# Altium PCB NumPadPCB.PcbDoc
Units mm, origin at the board's own origin, x right, y up, seen from the top; angles counter-clockwise.
Board outline 116.75 x 99.05 mm, 2 copper layers (Top Layer, Bottom Layer); 96 components, 85 nets, 416 pads, 90 vias.
Unrouted connection lines stored in the file: 5.
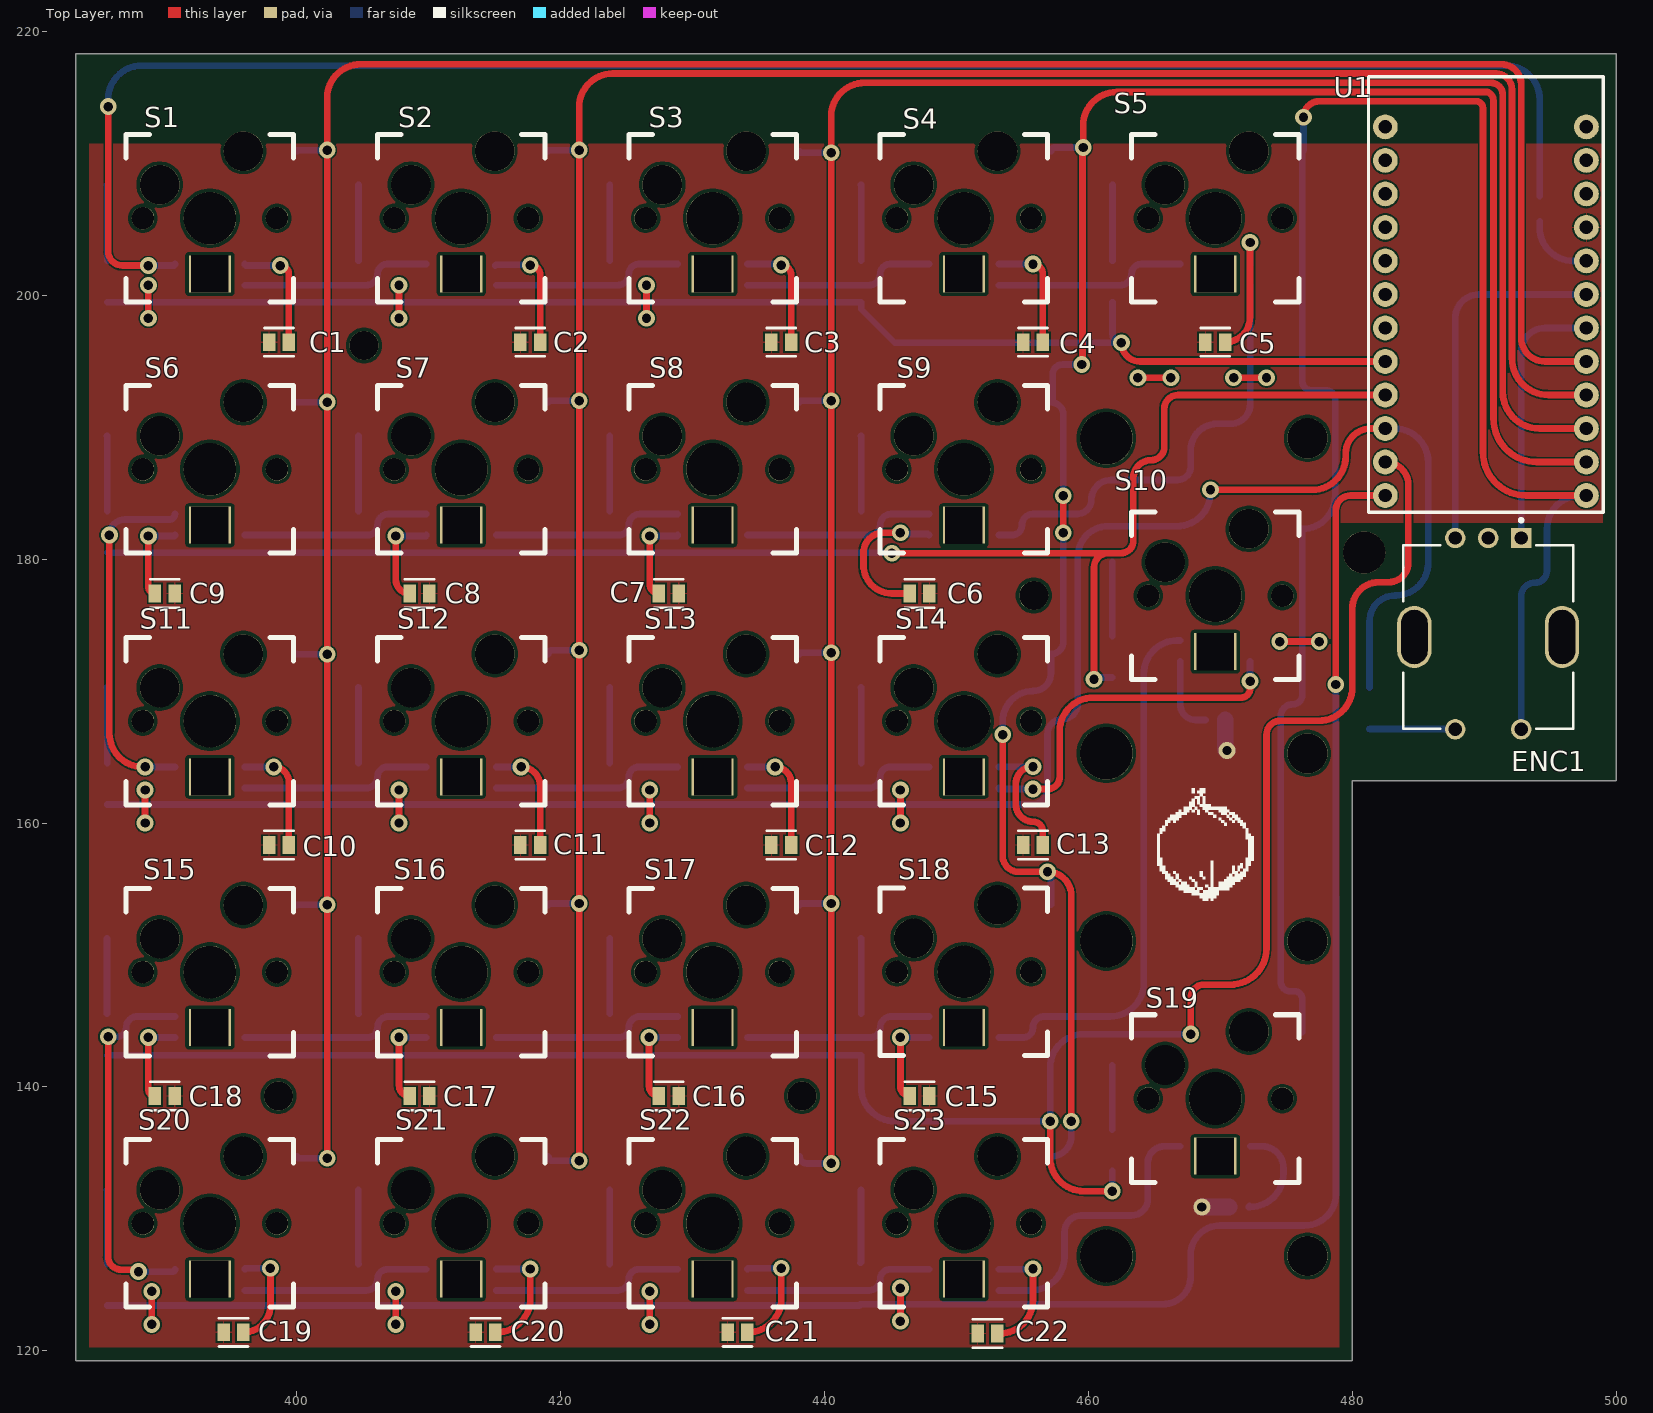
[diagram p0: Top Layer view]
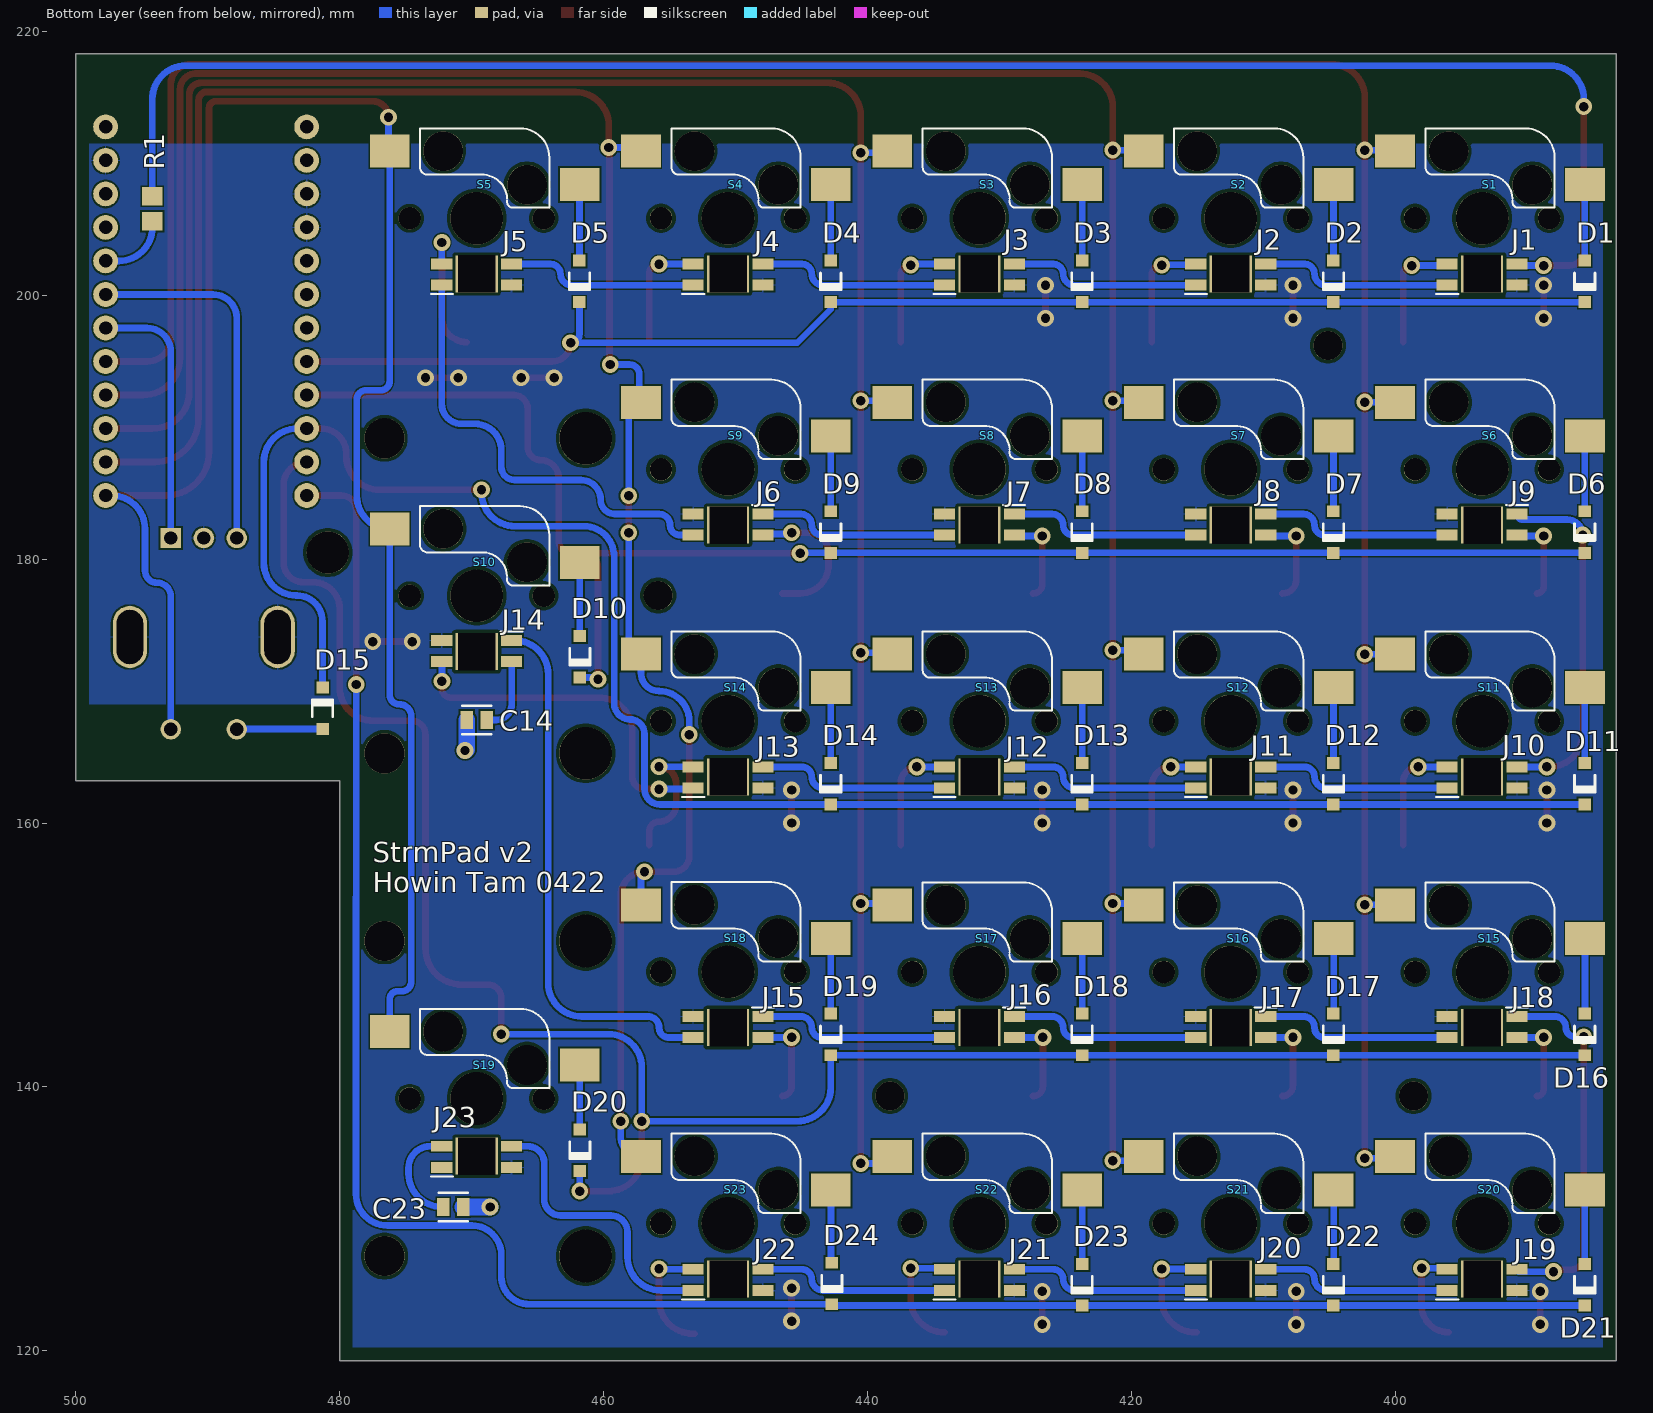
[diagram p1: Bottom Layer view, seen from below]

## Layer stack, top to bottom
Top Solder: solder mask 0.0102, Solder Resist, Dk 3.5
Top Layer: signal copper 0.0356
Dielectric 1: dielectric 0.32, FR-4, Dk 4.8
Bottom Layer: signal copper 0.0356
Bottom Solder: solder mask 0.0102, Solder Resist, Dk 3.5

## Board outline
383.25,119.25 383.25,218.3 500,218.3 500,163.2 480,163.2 480,119.25

## Design rules (kind name [scope] priority, off if disabled: settings)
BoardOutlineClearance [All] p1: gap=0.2 ignorepadtopadclearanceinfootprint=FALSE
Clearance [All] p1: gap=0.127 ignorepadtopadclearanceinfootprint=FALSE except(0.25: Arc-Hole Track-Hole SMDPad-Hole THPad-Hole Via-Hole Fill-Hole Poly-Hole Region-Hole Text-Hole)
ComponentClearance [All] p1: gap=0.127 collisioncheckmode=3 verticalgap=0.127 showdistances=TRUE
DiffPairsRouting [All] p1: maxlimit=0.254 minlimit=0.127 mostfreqgap=0.127 toplayer_minwidth=0.127 toplayer_maxwidth=25.4 toplayer_prefwidth=0.127 bottomlayer_minwidth=0.127 bottomlayer_maxwidth=25.4 bottomlayer_prefwidth=0.127 maxuncoupledlength=12.7
Height [All] p1: minheight=0 maxheight=1816.048 prefheight=12.7
HoleSize [All] p1: absolutevalues=TRUE maxlimit=6.3 minlimit=0.3 maxpercent=80.000 minpercent=20.000
HoleToHoleClearance [All] p1: gap=0.25 allowstackedmicrovias=FALSE
MinimumAnnularRing [All] p1: minimumring=0.076
MinimumSolderMaskSliver [All] p1: minsoldermaskwidth=0
PlaneClearance [All] p1: clearance=0.127
PlaneConnect PlaneConnectPowerPads [InPadClass('PowerPads')] p1: planeconnectstyle=Direct reliefexpansion=0.508 reliefentries=4 reliefconductorwidth=0.254 reliefairgap=0.254
PlaneConnect [All] p2: pad.planeconnectstyle=Relief pad.reliefexpansion=0.3 pad.reliefentries=4 pad.reliefconductorwidth=0.127 pad.reliefairgap=0.127 via.planeconnectstyle=Direct via.reliefexpansion=0.3 via.reliefentries=4 via.reliefconductorwidth=0.127 via.reliefairgap=0.127
PolygonConnect PolygonConnectPowerPads [All vs (InPadClass('PowerPads'))] p1: connectstyle=Direct reliefconductorwidth=0.254 reliefentries=4 polygonreliefangle="90 Angle" airgapwidth=0.254
PolygonConnect [All] p2: thpad.connectstyle=Relief thpad.reliefconductorwidth=0.127 thpad.reliefentries=4 thpad.polygonreliefangle="90 Angle" thpad.airgapwidth=0.127 smdpad.connectstyle=Relief smdpad.reliefconductorwidth=0.127 smdpad.reliefentries=4 smdpad.polygonreliefangle="90 Angle" smdpad.airgapwidth=0.127 via.connectstyle=Direct via.reliefconductorwidth=0.127 via.reliefentries=4 via.polygonreliefangle="90 Angle" via.airgapwidth=0.127
RoutingVias [All] p1: holewidth=0.3 width=0.6 viastyle="Through Hole" minholewidth=0.3 minwidth=0.6 maxholewidth=0.6 maxwidth=6.6
SilkToSilkClearance [All] p1: silktosilkclearance=0
SilkToSolderMaskClearance [IsPad] p1: minsilkscreentomaskgap=0.127 clearancetoexposedcopper=TRUE
SolderMaskExpansion [All] p1: expansion=0.075 istentingtop=FALSE
Width [All] p1: maxlimit=25.4 minlimit=0.127 preferedwidth=0.127 minimp=50.000000 maximp=50.000000 favimp=50.000000
20 further rules are at their usual default settings.

## Classes and differential pairs
component class InSwitchLEDs: C1 C2 C3 C4 C5 C6 C7 C8 C9 C10 C11 C12 C13 C14 C15 C16 C17 C18 C19 C20 C21 C22 C23 J1 J2 J3 J4 J5 J6 J7 J8 J9 J10 J11 J12 J13 J14 J15 J16 J17 J18 J19 J20 J21 J22 J23
component class Main_Design: * D1 D2 D3 D4 D5 D6 D7 D8 D9 D10 D11 D12 D13 D14 D15 D16 D17 D18 D19 D20 D21 D22 D23 D24 ENC1 R1 S1 S2 S3 S4 S5 S6 S7 S8 S9 S10 S11 S12 S13 S14 S15 S16 S17 S18 S19 S20 S21 S22 S23 U1

## Components (designator, comment, footprint, x,y, rotation, side; value= is the part's Value field where it differs from the comment)
C1 "C0805C104K5RACTU" FP-C0805C-DN-MFG 398.65,196.444 r180 top value="0.10 μF"
C2 "C0805C104K5RACTU" FP-C0805C-DN-MFG 417.7,196.444 r180 top value="0.10 μF"
C3 "C0805C104K5RACTU" FP-C0805C-DN-MFG 436.722,196.444 r180 top value="0.10 μF"
C4 "C0805C104K5RACTU" FP-C0805C-DN-MFG 455.794,196.444 r180 top value="0.10 μF"
C5 "C0805C104K5RACTU" FP-C0805C-DN-MFG 469.615,196.444 r180 top value="0.10 μF"
C6 "C0805C104K5RACTU" FP-C0805C-DN-MFG 447.2,177.402 r0 top value="0.10 μF"
C7 "C0805C104K5RACTU" FP-C0805C-DN-MFG 428.2,177.402 r0 top value="0.10 μF"
C8 "C0805C104K5RACTU" FP-C0805C-DN-MFG 409.3,177.402 r0 top value="0.10 μF"
C9 "C0805C104K5RACTU" FP-C0805C-DN-MFG 390,177.402 r0 top value="0.10 μF"
C10 "C0805C104K5RACTU" FP-C0805C-DN-MFG 398.65,158.327 r180 top value="0.10 μF"
C11 "C0805C104K5RACTU" FP-C0805C-DN-MFG 417.7,158.327 r180 top value="0.10 μF"
C12 "C0805C104K5RACTU" FP-C0805C-DN-MFG 436.722,158.327 r180 top value="0.10 μF"
C13 "C0805C104K5RACTU" FP-C0805C-DN-MFG 455.794,158.327 r180 top value="0.10 μF"
C14 "C0805C104K5RACTU" FP-C0805C-DN-MFG 469.615,167.814 r0 bottom value="0.10 μF"
C15 "C0805C104K5RACTU" FP-C0805C-DN-MFG 447.2,139.317 r0 top value="0.10 μF"
C16 "C0805C104K5RACTU" FP-C0805C-DN-MFG 428.2,139.302 r0 top value="0.10 μF"
C17 "C0805C104K5RACTU" FP-C0805C-DN-MFG 409.3,139.302 r0 top value="0.10 μF"
C18 "C0805C104K5RACTU" FP-C0805C-DN-MFG 390,139.302 r0 top value="0.10 μF"
C19 "C0805C104K5RACTU" FP-C0805C-DN-MFG 395.2,121.4 r180 top value="0.10 μF"
C20 "C0805C104K5RACTU" FP-C0805C-DN-MFG 414.3,121.4 r180 top value="0.10 μF"
C21 "C0805C104K5RACTU" FP-C0805C-DN-MFG 433.4,121.4 r180 top value="0.10 μF"
C22 "C0805C104K5RACTU" FP-C0805C-DN-MFG 452.35,121.3 r180 top value="0.10 μF"
C23 "C0805C104K5RACTU" FP-C0805C-DN-MFG 471.4,130.9 r180 bottom value="0.10 μF"
D1 "1N4148W-7-F" DIOD-SOD123-2_V 385.63,201.05 r270 bottom
D2 "1N4148W-7-F" DIOD-SOD123-2_V 404.68,201.05 r270 bottom
D3 "1N4148W-7-F" DIOD-SOD123-2_V 423.73,201.05 r270 bottom
D4 "1N4148W-7-F" DIOD-SOD123-2_V 442.78,201.05 r270 bottom
D5 "1N4148W-7-F" DIOD-SOD123-2_V 461.83,201.05 r270 bottom
D6 "1N4148W-7-F" DIOD-SOD123-2_V 385.63,182.05 r270 bottom
D7 "1N4148W-7-F" DIOD-SOD123-2_V 404.68,182.05 r270 bottom
D8 "1N4148W-7-F" DIOD-SOD123-2_V 423.73,182.05 r270 bottom
D9 "1N4148W-7-F" DIOD-SOD123-2_V 442.78,182.05 r270 bottom
D10 "1N4148W-7-F" DIOD-SOD123-2_V 461.8,172.6 r270 bottom
D11 "1N4148W-7-F" DIOD-SOD123-2_V 385.63,162.975 r270 bottom
D12 "1N4148W-7-F" DIOD-SOD123-2_V 404.68,162.975 r270 bottom
D13 "1N4148W-7-F" DIOD-SOD123-2_V 423.73,162.975 r270 bottom
D14 "1N4148W-7-F" DIOD-SOD123-2_V 442.78,162.975 r270 bottom
D15 "1N4148W-7-F" DIOD-SOD123-2_V 481.3,168.7 r90 bottom
D16 "1N4148W-7-F" DIOD-SOD123-2_V 385.63,143.975 r270 bottom
D17 "1N4148W-7-F" DIOD-SOD123-2_V 404.68,143.975 r270 bottom
D18 "1N4148W-7-F" DIOD-SOD123-2_V 423.73,143.975 r270 bottom
D19 "1N4148W-7-F" DIOD-SOD123-2_V 442.78,143.975 r270 bottom
D20 "1N4148W-7-F" DIOD-SOD123-2_V 461.8,135.2 r270 bottom
D21 "1N4148W-7-F" DIOD-SOD123-2_V 385.63,125 r270 bottom
D22 "1N4148W-7-F" DIOD-SOD123-2_V 404.68,125 r270 bottom
D23 "1N4148W-7-F" DIOD-SOD123-2_V 423.73,125 r270 bottom
D24 "1N4148W-7-F" DIOD-SOD123-2_V 442.7,125.1 r270 bottom
ENC1 "PEC12R-4225F-S0024" FP-PEC12R-4225F-S0024-MFG 490.3,174.1 r180 top
J1 "4960" 4960_Adafruit 397.315,201.216 r180 bottom
J2 "4960" 4960_Adafruit 416.365,201.216 r180 bottom
J3 "4960" 4960_Adafruit 435.415,201.216 r180 bottom
J4 "4960" 4960_Adafruit 454.465,201.216 r180 bottom
J5 "4960" 4960_Adafruit 473.515,201.216 r180 bottom
J6 "4960" 4960_Adafruit 446.665,182.973 r0 bottom
J7 "4960" 4960_Adafruit 427.615,182.973 r0 bottom
J8 "4960" 4960_Adafruit 408.565,182.973 r0 bottom
J9 "4960" 4960_Adafruit 389.515,182.973 r0 bottom
J10 "4960" 4960_Adafruit 397.315,163.098 r180 bottom
J11 "4960" 4960_Adafruit 416.365,163.098 r180 bottom
J12 "4960" 4960_Adafruit 435.415,163.098 r180 bottom
J13 "4960" 4960_Adafruit 454.465,163.098 r180 bottom
J14 "4960" 4960_Adafruit 465.715,173.389 r0 bottom
J15 "4960" 4960_Adafruit 446.665,144.89 r0 bottom
J16 "4960" 4960_Adafruit 427.615,144.89 r0 bottom
J17 "4960" 4960_Adafruit 408.565,144.89 r0 bottom
J18 "4960" 4960_Adafruit 389.515,144.89 r0 bottom
J19 "4960" 4960_Adafruit 397.315,125.025 r180 bottom
J20 "4960" 4960_Adafruit 416.365,125.025 r180 bottom
J21 "4960" 4960_Adafruit 435.415,125.025 r180 bottom
J22 "4960" 4960_Adafruit 454.465,125.025 r180 bottom
J23 "4960" 4960_Adafruit 473.515,134.348 r180 bottom
R1 "ERA6AEB511V" RESC2013X60X40ML20T25 494.2,206.55 r90 bottom
S1 "PG151101S11" SW_PG151101S11 375,200 r0 top
S2 "PG151101S11" SW_PG151101S11 394.05,200 r0 top
S3 "PG151101S11" SW_PG151101S11 413.1,200 r0 top
S4 "PG151101S11" SW_PG151101S11 432.15,200 r0 top
S5 "PG151101S11" SW_PG151101S11 451.193,200 r0 top
S6 "PG151101S11" SW_PG151101S11 375,180.958 r0 top
S7 "PG151101S11" SW_PG151101S11 394.05,180.958 r0 top
S8 "PG151101S11" SW_PG151101S11 413.1,180.958 r0 top
S9 "PG151101S11" SW_PG151101S11 432.15,180.958 r0 top
S10 "PG151101S11" SW_PG151101S11 451.2,171.375 r0 top
S11 "PG151101S11" SW_PG151101S11 375,161.883 r0 top
S12 "PG151101S11" SW_PG151101S11 394.05,161.883 r0 top
S13 "PG151101S11" SW_PG151101S11 413.1,161.883 r0 top
S14 "PG151101S11" SW_PG151101S11 432.15,161.883 r0 top
S15 "PG151101S11" SW_PG151101S11 375,142.858 r0 top
S16 "PG151101S11" SW_PG151101S11 394.05,142.858 r0 top
S17 "PG151101S11" SW_PG151101S11 413.1,142.858 r0 top
S18 "PG151101S11" SW_PG151101S11 432.15,142.873 r0 top
S19 "PG151101S11" SW_PG151101S11 451.2,133.275 r0 top
S20 "PG151101S11" SW_PG151101S11 375,123.808 r0 top
S21 "PG151101S11" SW_PG151101S11 394.05,123.808 r0 top
S22 "PG151101S11" SW_PG151101S11 413.1,123.808 r0 top
S23 "PG151101S11" SW_PG151101S11 432.15,123.808 r0 top
U1 "ProMicro" PCBComponent_1 469.8,193.71 r0 top

## Footprints (in the part's own frame and the unit in brackets; to place one, negate y for a bottom-side part, rotate by r counter-clockwise, add the part's x,y. Pads: shape width x height; smd on the part's side, far side on the other; paste and mask are expansions set on the pad)
4960_Adafruit [mm]
  rect 1.6x0.82 smd mask+0.051: 1(1.25,1.15) 2(1.25,-0.45) 3(6.55,-0.45) 4(6.55,1.15)
  rect 3.2x2.8 hole 2.8 square paste-3.988 mask+0.051: Un1(3.9,0.4)
  silkscreen extent 0.43,-1.12 2.1,-1.12
DIOD-SOD123-2_V [mm] "SOD123, 2-Leads, Body 2.7x1.55mm, Height 1.45mm"
  rect 0.9x0.95 smd: 1(-1.575,0) 2(1.575,0)
  silkscreen extent -0.64,-0.83 0.64,0.77, body extent -1.35,-0.77 1.35,0.77, height 1.45
FP-C0805C-DN-MFG [mm]
  rect 0.95x1.35 smd paste+0 mask+0: 1(-0.75,0) 2(0.75,0)
  silkscreen extent -1.1,-1.07 1.1,1.07, body extent -1.4,-0.85 1.4,0.85, height 0.25
FP-PEC12R-4225F-S0024-MFG [mm]
  round 1.55 hole 1 paste-1000 mask+0: 1(-2.5,7) 2(2.5,7) B(2.5,-7.5) C(0,-7.5)
  rrect100% 2.6x4.7 hole 4.1 slot 2 at 0 deg paste-1000 mask+0: 3(-5.6,0) 4(5.6,0)
  rect 1.55x1.55 hole 1 paste-1000 mask+0: A(-2.5,-7.5)
  silkscreen extent -6.45,-8.97 6.45,6.95, body extent -7,-8.37 7,7.88, height 0.25
PCBComponent_1 [mil]
  round 74 hole 40: 1(500,750) 2(500,650) 3(500,550) 4(500,450) 5(500,350) 6(500,250) 7(500,150) 8(500,50) 9(500,-50) 10(500,-150) 11(500,-250) 12(500,-350) 13(1100,-350) 14(1100,-250) 15(1100,-150) 16(1100,-50) 17(1100,50) 18(1100,150) 19(1100,250) 20(1100,350) 21(1100,450) 22(1100,550) 23(1100,650) 24(1100,750)
  silkscreen extent 450,-400 1150,900
RESC2013X60X40ML20T25 [mm] "Chip Resistor, 2-Leads, Body 2.00x1.25mm, IPC Low Density"
  rect 1.4x1.55 smd: 1(-0.95,0) 2(0.95,0)
  body extent -1.1,-0.72 1.1,0.72, height 0.6
SW_PG151101S11 [mil]
  rect 118.11x98.43 smd far side mask+2.01: 1(984.84,430) 2(417.91,330)
  round 157 hole 157 paste-157 mask+2.01: Un1(725,230)
  round 67 hole 67 paste-67 mask+2.01: Un2(525,230) Un3(925,230)
  round 118.11 hole 118.11 paste-118.11 mask+2.01: Un4(825,430) Un5(575,330)
  silkscreen extent 475,-20 975,480

## Part data
C1 C2 C3 C4 C5 C6 C7 C8 C9 C10 C11 C12 C13 C14 C15 C16 C17 C18 C19 C20 C21 C22 C23: library part CMP-2007-00279-2, "CAP CER 0.1UF 50V X7R 0805", Capacitance="0.10 μF", Manufacturer=KEMET, Package=C0805C-DN, Temperature="-55°C to +125°C", Temperature Characteristic=X7R, Temperature Coefficient=30ppm/°C, Temperature Range High=+125°C, Temperature Range Low=-55°C, Tolerance=0.1, Voltage Rating="50 V", Automotive=No, Category=Cap, ComponentLink2Description=Datasheet, ComponentLink2URL=https://content.kemet.com/datasheets/KEM_C1003_C0G_SMD.pdf, Device Class L1="Passive Components", Device Class L2=Capacitors, Device Class L3="Ceramic Capacitors", Digikey Description="CAP CER 0.1UF 50V X7R 0805", Height=0.88mm, Ipc Land Pattern Name=CAPC200125X78, Lead Free=Yes, Manufacturer Part Number=C0805C104K5RACTU, Material=Ceramic, Mouser Description="Cap Ceramic 0.1uF 50V X7R 10% SMD 2.0 x 1.2 mm 125 C Paper T/R", Octopart=https://octopart.com/c0805c104k5ractu-kemet-143926, RoHS=TRUE
D1 D2 D3 D4 D5 D6 D7 D8 D9 D10 D11 D12 D13 D14 D15 D16 D17 D18 D19 D20 D21 D22 D23 D24: library part CMP-2000-04932-2, "Fast Switching Diode, 100 V, 0.15 A, -65 to 150 degC, 2-Pin?SOD123, RoHS, Tape and Reel", If - Forward Current=0.15A, Ir - Reverse Current=1uA, Manufacturer=DiodesIncorporated, Max Surge Current=2A, Maximum Operating Temperature=+150C, Minimum Operating Temperature=-65C, Operating Temperature Range=-65Cto+150C, Package / Case=SOD-123, Package Reference=SOD123-2, Peak Reverse Voltage=100V, Vf - Forward Voltage=1.25V, Brand=DiodesIncorporated, Configuration=Single, Datasheet URL=http://www.farnell.com/datasheets/1915529.pdf, Datasheet Version="Rev. 24-2, 10/2013", Factory Pack Quantity=3000, Height=1.25mm, Length=2.85mm, Manufacturer URL=http://www.diodes.com/, Mounting Style=SMD/SMT, Package URL=http://www.diodes.com/datasheets/ds18004.pdf, Packaging=Reel, Product=SwitchingDiodes, Product Category=Diodes-GeneralPurpose,Power,Switching, Recovery Time=4ns, RoHS=True, Series=1N4148, Type=SwitchingDiode, Unit Weight=0.000353oz, Width=1.7mm
ENC1: library part CMP-07421-000041-1, "ROTARY ENCODER MECHANICAL 24PPR", Max Operating Temperature=70°C, Min Operating Temperature=-30°C, Package Quantity=75, Built in Switch=Yes, Detent=Yes, Encoder Type=Mechanical, Height=13.4mm, Hole Diameter=1mm, Length=13.4mm, Mount="Through Hole", Number of Channels=2, Orientation=Vertical, Output Type=Quadrature, Packaging=Bulk, Pulses per Revolution=24, REACH SVHC="No SVHC", RoHS Compliant=Yes, Series=PEC12R, Termination="PC Pin", Width=12.5mm
J1 J2 J3 J4 J5 J6 J7 J8 J9 J10 J11 J12 J13 J14 J15 J16 J17 J18 J19 J20 J21 J22 J23 U1: library part Component_1
R1: library part CMP-2001-00648-1, Manufacturer=Panasonic, Part Number=ERA6AEB511V
S1 S2 S3 S4 S5 S6 S7 S8 S9 S10 S11 S12 S13 S14 S15 S16 S17 S18 S19 S20 S21 S22 S23: "Keyswitch", Package=Package, Availability=Unavailable, MF=Kailh, MP=PG151101S11, Price=None, SnapEDA_Link=https://www.snapeda.com/parts/PG151101S11/Kailh/view-part/4218555/?ref=snap

## Free pads (board coordinates)
  round 2.2 hole 2.2: 1(405.1,196.198) 3(398.608,139.302) 3(455.858,177.25) 4(438.288,139.302)
  round 3.2 hole 3.2: 2(480.9,180.5)
  round 3.988 hole 3.988: ST1(461.36,127.179) ST1(461.36,151.055) ST1(461.36,165.279) ST1(461.36,189.155)
  round 3.048 hole 3.048: ST4(476.6,127.179) ST4(476.6,151.055) ST4(476.6,165.279) ST4(476.6,189.155)

## Via types
v1: diameter 1.27, hole 0.711, Top Layer to Bottom Layer, 90 vias

## Nets (pads, with @x,y where several pads share a name; then routed paths per layer and width w, separated by ;. In a path a pad name is that pad's centre, name@x,y a point inside that pad or via, vN(x,y) a via of type N, cw(c..) or ccw(c..) an arc to the next point about the centre after c; other vN are vias at no path point)
Col0: S1.1 S6.1 S11.1 S15.1 S20.1 U1.17 | length 209.9
  Top Layer w0.508: v1(402.3,134.6) v1(402.3,153.8) v1(402.3,172.8) v1(402.3,191.9) v1(402.3,211) 402.3,214.96 cw(c404.84,214.96) 404.84,217.5 491.3,217.5 cw(c491.3,216) 492.8,216 492.8,196.784 ccw(c494.604,196.784) 494.604,194.98 U1.17
  Bottom Layer w0.508: S20.1 ccw(c400.145,134.73) 400.145,134.6 v1(402.3,134.6) ; S15.1 cw(c400.035,153.78) 400.035,153.8 v1(402.3,153.8) ; S11.1 400.015,172.8 v1(402.3,172.8) ; S6.1 cw(c400.035,191.88) 400.035,191.9 v1(402.3,191.9) ; S1.1 cw(c400.093,210.922) 400.093,211 v1(402.3,211)
Col1: S2.1 S7.1 S12.1 S16.1 S21.1 U1.16 | length 192.5
  Top Layer w0.508: v1(421.4,134.4) v1(421.4,153.9) v1(421.4,173.1) v1(421.4,192) v1(421.4,211) 421.4,214.26 cw(c423.94,214.26) 423.94,216.8 490.9,216.8 cw(c490.9,215.6) 492.1,215.6 492.1,195.22 ccw(c494.88,195.22) 494.88,192.44 U1.16
  Bottom Layer w0.508: S21.1 ccw(c419.395,134.73) 419.395,134.4 v1(421.4,134.4) ; S16.1 cw(c419.185,153.78) 419.185,153.9 v1(421.4,153.9) ; S12.1 cw(c419.36,172.805) 419.36,173.1 v1(421.4,173.1) ; S7.1 cw(c419.185,191.88) 419.185,192 v1(421.4,192) ; S2.1 cw(c419.143,210.922) 419.143,211 v1(421.4,211)
Col2: S3.1 S8.1 S13.1 S17.1 S22.1 U1.15 | length 175.2
  Top Layer w0.508: v1(440.5,134.2) v1(440.5,153.9) v1(440.5,172.9) v1(440.5,192) v1(440.5,210.8) 440.5,213.56 cw(c443.04,213.56) 443.04,216.1 490.5,216.1 cw(c490.5,215.2) 491.4,215.2 491.4,192.68 ccw(c494.18,192.68) 494.18,189.9 U1.15
  Bottom Layer w0.508: S22.1 ccw(c438.645,134.73) 438.645,134.2 v1(440.5,134.2) ; S17.1 cw(c438.235,153.78) 438.235,153.9 v1(440.5,153.9) ; S13.1 cw(c438.21,172.805) 438.21,172.9 v1(440.5,172.9) ; S8.1 cw(c438.235,191.88) 438.235,192 v1(440.5,192) ; S3.1 ccw(c438.237,210.922) 438.237,210.8 v1(440.5,210.8)
Col3: S4.1 S9.1 S14.1 S18.1 S23.1 U1.14 | length 159.3
  Top Layer w0.508: v1(453.5,166.7) 453.5,157.5 ccw(c454.7,157.5) 454.7,156.3 v1(456.9,156.3) cw(c456.9,154.5) 458.7,154.5 v1(458.7,137.4) ; v1(458.1,182) v1(458.1,184.8) ; v1(459.5,194.75) 459.55,194.8 459.55,211.15 v1(459.6,211.2) 459.6,212.86 cw(c462.14,212.86) 462.14,215.4 488.391,215.4 490.233,215.4 cw(c490.033,214.764) 490.7,214.764 490.7,190.64 ccw(c493.98,190.64) 493.98,187.36 U1.14
  Bottom Layer w0.508: v1(453.5,166.7) 453.5,167.7 cw(c455.8,167.7) 455.8,170 ccw(c455.8,171.365) 457.165,171.365 S14.1 ccw(c457.165,173.74) 458.1,173.74 v1(458.1,182) ; v1(456.9,156.3) cw(c456.9,156.035) 457.165,156.035 S18.1 ; S23.1 ccw(c457.165,136.265) 458.7,136.265 v1(458.7,137.4) ; S4.1 cw(c457.443,210.922) 457.443,211.2 v1(459.6,211.2) ; v1(458.1,184.8) 458.1,190.945 ccw(c457.165,190.945) 457.683,191.723 ccw(c457.165,190.945) S9.1 ccw(c457.165,192.011) 457.296,192.011 457.296,194.016 cw(c458.03,194.016) 458.03,194.75 v1(459.5,194.75)
Col4: ENC1.1 S5.1 S10.1 S19.1 U1.13 | length 145.8
  Top Layer w0.508: v1(476.3,213.5) cw(c477.5,213.5) 477.5,214.7 489.4,214.7 cw(c489.4,214.2) 489.711,214.592 489.792,214.511 cw(c489.4,214.2) 489.9,214.2 489.9,188.1 ccw(c493.18,188.1) 493.18,184.82 U1.13
  Bottom Layer w0.508: S19.1@476.208,144.165 476.208,146.646 ccw(c475.604,146.646) 475.604,147.25 475.298,147.25 cw(c475.298,147.976) 474.572,147.976 474.572,168.072 cw(c475.5,168.072) 475.5,169 ccw(c475.5,169.708) 476.208,169.708 476.208,182.292 ccw(c476.208,184.784) 478.7,184.784 478.7,192.1 ccw(c478,192.1) 478,192.8 476.9,192.8 cw(c476.9,193.485) 476.215,193.485 476.215,210.922 ccw(c476.215,211.007) 476.3,211.007 v1(476.3,213.5) ; ENC1.1 492.8,177.16 cw(c493.854,177.16) 493.854,178.214 ccw(c493.854,179.11) 494.75,179.11 494.75,182.28 cw(c497.29,182.28) 497.29,184.82 U1.13
En_A: ENC1.A U1.18 | length 20.1
  Bottom Layer w0.508: ENC1.A 492.8,195.72 cw(c494.6,195.72) 494.6,197.52 U1.18
En_B: ENC1.B U1.19 | length 27.6
  Bottom Layer w0.508: ENC1.B 487.8,198.26 cw(c489.6,198.26) 489.6,200.06 U1.19
Encode_Out: D15.1 ENC1.2 | length 6.5
  Bottom Layer w0.508: D15.1 487.775,167.125 cw(c487.775,167.1) ENC1.2
GND: ENC1.3 ENC1.4 ENC1.C J1.3 J2.3 J3.3 J4.3 J5.3 J6.3 J7.3 J8.3 J9.3 J10.3 J11.3 J12.3 J13.3 J14.3 J15.3 J16.3 J17.3 J18.3 J19.3 J20.3 J21.3 J22.3 J23.3 U1.3 U1.4 U1.23 | length 35.5
  Top Layer w0.508: v1(388.5,160) v1(388.5,162.5) ; v1(388.75,198.25) v1(388.75,200.75) ; v1(389,122) v1(389,124.5) ; v1(407.5,122) v1(407.5,124.5) ; v1(407.75,160) v1(407.75,162.5) ; v1(407.75,198.25) v1(407.75,200.75) ; v1(426.5,198.25) v1(426.5,200.75) ; v1(426.75,122) v1(426.75,124.5) ; v1(426.75,160) v1(426.75,162.5) ; v1(445.75,122.25) v1(445.75,124.75) ; v1(445.75,160) v1(445.75,162.5) ; v1(463.75,193.75) v1(466.25,193.75) ; v1(471,193.75) v1(473.5,193.75) ; v1(474.5,173.75) v1(477.5,173.75)
LED1: J7.2 J8.4 | length 14.7
  Bottom Layer w0.508: J8.4 424.415,181.823 ccw(c424.415,182.573) 425.165,182.573 cw(c426.015,182.573) 426.015,183.423 J7.2
LED2: J14.2 J15.4 | length 41
  Bottom Layer w0.508: J15.4 455.044,143.74 ccw(c455.044,144.49) 455.794,144.49 cw(c456.644,144.49) 456.644,145.34 461.66,145.34 ccw(c461.66,147.88) 464.2,147.88 464.2,171.299 cw(c466.74,171.299) 466.74,173.839 J14.2
LED3: J21.2 J22.4 | length 14.7
  Bottom Layer w0.508: J21.2 443.365,124.575 ccw(c443.365,125.425) 444.215,125.425 cw(c444.965,125.425) 444.965,126.175 J22.4
LEDs: J1.4 R1.2 | length 136
  Top Layer w0.508: v1(385.7,214.3) 385.7,203.34 ccw(c386.79,203.34) 386.79,202.25 v1(388.75,202.25)
  Bottom Layer w0.508: v1(385.7,214.3) 385.7,214.86 cw(c388.24,214.86) 388.24,217.4 491.66,217.4 cw(c491.66,214.86) 494.2,214.86 R1.2 ; v1(388.75,202.25) 390.649,202.25 ccw(c390.649,202.366) J1.4
NetC1_1: C1.1 J1.1 | length 9.1
  Top Layer w0.508: v1@398.75,202.044 v1(398.75,202.25) cw(c398.75,201.6) 399.4,201.6 C1.1
  Bottom Layer w0.508: J1.1 ccw(c396.181,202.366) 396.181,202.25 v1(398.75,202.25)
NetC2_1: C2.1 J2.1 | length 9.3
  Top Layer w0.508: v1@417.7,202.068 v1(417.7,202.274) cw(c417.7,202.32) 417.654,202.32 cw(c417.654,201.524) 418.45,201.524 C2.1
  Bottom Layer w0.508: J2.1@415.044,202.25 415.114,202.32 417.654,202.32 v1(417.7,202.274)
NetC3_1: C3.1 J3.1 | length 9.1
  Top Layer w0.508: v1@436.722,202.08 v1(436.722,202.287) cw(c436.722,201.537) 437.472,201.537 C3.1
  Bottom Layer w0.508: J3.1 436.643,202.366 cw(c436.643,202.287) v1(436.722,202.287)
NetC4_1: C4.1 J4.1 | length 9.1
  Top Layer w0.508: v1@455.794,202.158 v1(455.794,202.364) cw(c455.794,201.614) 456.544,201.614 C4.1
  Bottom Layer w0.508: J4.1 455.794,202.366 v1(455.794,202.364)
NetC5_1: C5.1 J5.1 | length 10.3
  Top Layer w0.508: C5.1 ccw(c470.365,198.329) 472.25,198.329 v1(472.25,204)
  Bottom Layer w0.508: v1(472.25,204) 472.265,204 J5.1
NetC6_1: C6.1 J6.1 | length 11.6
  Top Layer w0.508: v1(445.75,182) 444.47,182 ccw(c444.47,180.475) 442.945,180.475 442.945,179.555 ccw(c445.098,179.555) 445.098,177.402 C6.1
  Bottom Layer w0.508: v1(445.75,182) 445.838,181.912 447.827,181.912 J6.1
NetC7_1: C7.1 J7.1 | length 6.9
  Top Layer w0.508: v1(426.75,181.75) 426.75,178.102 ccw(c427.45,178.102) C7.1
  Bottom Layer w0.508: v1(426.75,181.75) 428.792,181.75 ccw(c428.792,181.823) J7.1
NetC8_1: C8.1 J8.1 | length 7.3
  Top Layer w0.508: v1(407.5,181.75) 407.5,178.452 ccw(c408.55,178.452) C8.1
  Bottom Layer w0.508: v1(407.5,181.75) 409.742,181.75 ccw(c409.742,181.823) J8.1
NetC9_1: C9.1 J9.1 | length 6.7
  Top Layer w0.508: v1(388.75,181.75) 388.75,177.902 ccw(c389.25,177.902) C9.1
  Bottom Layer w0.508: v1(388.75,181.75) 390.692,181.75 ccw(c390.692,181.823) J9.1
NetC10_1: C10.1 J10.1 | length 8.8
  Top Layer w0.508: v1(398.25,164.25) cw(c398.25,163.1) 399.4,163.1 C10.1
  Bottom Layer w0.508: J10.1 396.065,164.25 v1(398.25,164.25)
NetC11_1: C11.1 J11.1 | length 8.6
  Top Layer w0.508: v1(417,164.25) cw(c417,162.8) 418.45,162.8 C11.1
  Bottom Layer w0.508: J11.1 415.115,164.25 v1(417,164.25)
NetC12_1: C12.1 J12.1 | length 8.7
  Top Layer w0.508: v1(436.25,164.25) cw(c436.25,163.028) 437.472,163.028 C12.1
  Bottom Layer w0.508: J12.1 434.165,164.25 v1(436.25,164.25)
NetC13_1: C13.1 J13.1 | length 10.4
  Top Layer w0.508: v1(455.794,164.273) ccw(c455.794,162.979) 454.5,162.979 454.5,161.399 ccw(c455.794,161.399) 455.794,160.105 cw(c455.794,159.355) 456.544,159.355 C13.1
  Bottom Layer w0.508: J13.1 cw(c453.24,164.248) 453.24,164.273 v1(455.794,164.273)
NetC14_1: C14.1 J14.1 | length 5.8
  Bottom Layer w0.508: J14.1 466.965,168.989 ccw(c468.14,168.989) 468.14,167.814 C14.1
NetC15_1: C15.1 J15.1 | length 7
  Top Layer w0.508: v1(445.75,143.75) 445.75,140.017 ccw(c446.45,140.017) C15.1
  Bottom Layer w0.508: v1(445.75,143.75) 447.915,143.75 J15.1
NetC16_1: C16.1 J16.1 | length 7.1
  Top Layer w0.508: v1(426.7,143.75) 426.7,140.052 ccw(c427.45,140.052) C16.1
  Bottom Layer w0.508: v1(426.7,143.75) 428.865,143.75 J16.1
NetC17_1: C17.1 J17.1 | length 7
  Top Layer w0.508: v1(407.75,143.75) 407.75,140.102 ccw(c408.55,140.102) C17.1
  Bottom Layer w0.508: v1(407.75,143.75) 409.815,143.75 J17.1
NetC18_1: C18.1 J18.1 | length 6.8
  Top Layer w0.508: v1(388.75,143.75) 388.75,139.802 ccw(c389.25,139.802) C18.1
  Bottom Layer w0.508: v1(388.75,143.75) 390.765,143.75 J18.1
NetC19_1: C19.1 J19.1 | length 8
  Top Layer w0.508: C19.1 ccw(c395.95,123.45) 398,123.45 v1(398,126.25)
  Bottom Layer w0.508: J19.1 cw(c396.14,126.175) 396.14,126.25 v1(398,126.25)
NetC20_1: C20.1 J20.1 | length 9
  Top Layer w0.508: C20.1 415.16,121.4 ccw(c415.16,123.94) 417.7,123.94 v1(417.7,126.198)
  Bottom Layer w0.508: J20.1 cw(c415.138,126.175) 415.138,126.198 v1(417.7,126.198)
NetC21_1: C21.1 J21.1 | length 8.9
  Top Layer w0.508: C21.1 434.182,121.4 ccw(c434.182,123.94) 436.722,123.94 v1(436.722,126.253)
  Bottom Layer w0.508: J21.1 cw(c434.242,126.175) 434.242,126.253 v1(436.722,126.253)
NetC22_1: C22.1 J22.1 | length 9.1
  Top Layer w0.508: C22.1 453.254,121.3 ccw(c453.254,123.84) 455.794,123.84 v1(455.794,126.224)
  Bottom Layer w0.508: J22.1 455.745,126.175 ccw(c455.745,126.224) v1(455.794,126.224)
NetC23_1: C23.1 J23.1 | length 8.1
  Bottom Layer w0.508: C23.1@472.215,130.965 cw(c472.15,130.965) C23.1 472.242,130.9 ccw(c472.242,133.44) 474.782,133.44 474.782,133.856 ccw(c473.14,133.856) 473.14,135.498 J23.1
NetD1_1: D1.1 S1.2 | length 5.8
  Bottom Layer w0.508: S1.2 385.63,208.367 D1.1
NetD2_1: D2.1 S2.2 | length 5.8
  Bottom Layer w0.508: S2.2 404.68,208.367 D2.1
NetD3_1: D3.1 S3.2 | length 5.8
  Bottom Layer w0.508: S3.2 423.73,208.367 D3.1
NetD4_1: D4.1 S4.2 | length 5.8
  Bottom Layer w0.508: S4.2 442.78,208.367 D4.1
NetD5_1: D5.1 S5.2 | length 5.8
  Bottom Layer w0.508: S5.2 cw(c461.808,208.36) 461.83,208.36 D5.1
NetD6_1: D6.1 S6.2 | length 5.7
  Bottom Layer w0.508: S6.2 385.63,189.34 D6.1
NetD7_1: D7.1 S7.2 | length 5.7
  Bottom Layer w0.508: S7.2 404.68,189.34 D7.1
NetD8_1: D8.1 S8.2 | length 5.7
  Bottom Layer w0.508: S8.2 423.73,189.34 D8.1
NetD9_1: D9.1 S9.2 | length 5.7
  Bottom Layer w0.508: S9.2 442.78,189.34 D9.1
NetD10_1: D10.1 S10.2 | length 5.6
  Bottom Layer w0.508: D10.1 461.808,174.175 S10.2@461.808,179.79
NetD11_1: D11.1 S11.2 | length 5.7
  Bottom Layer w0.508: S11.2 385.63,170.265 D11.1
NetD12_1: D12.1 S12.2 | length 5.7
  Bottom Layer w0.508: S12.2 404.68,170.265 D12.1
NetD13_1: D13.1 S13.2 | length 5.7
  Bottom Layer w0.508: S13.2 423.715,164.55 D13.1
NetD14_1: D14.1 S14.2 | length 5.7
  Bottom Layer w0.508: S14.2 442.78,170.265 D14.1
NetD16_1: D16.1 S15.2 | length 5.7
  Bottom Layer w0.508: S15.2 385.615,145.55 D16.1
NetD17_1: D17.1 S16.2 | length 5.7
  Bottom Layer w0.508: S16.2 404.665,145.55 D17.1
NetD18_1: D18.1 S17.2 | length 5.7
  Bottom Layer w0.508: S17.2 423.73,151.24 D18.1
NetD19_1: D19.1 S18.2 | length 5.7
  Bottom Layer w0.508: S18.2 442.78,151.255 D19.1
NetD20_1: D20.1 S19.2 | length 4.9
  Bottom Layer w0.508: D20.1 461.8,141.625 S19.2@461.808,141.625
NetD21_1: D21.1 S20.2 | length 5.6
  Bottom Layer w0.508: S20.2 385.63,132.19 D21.1
NetD22_1: D22.1 S21.2 | length 5.6
  Bottom Layer w0.508: S21.2 404.665,126.575 D22.1
NetD23_1: D23.1 S22.2 | length 5.6
  Bottom Layer w0.508: S22.2 423.73,132.19 D23.1
NetD24_1: D24.1 S23.2 | length 5.6
  Bottom Layer w0.508: D24.1 ccw(c442.7,126.74) 442.765,126.74 S23.2
NetJ1_2: J1.2 J2.4 | length 14.7
  Bottom Layer w0.508: J1.2 405.265,200.766 ccw(c405.265,201.616) 406.115,201.616 cw(c406.865,201.616) 406.865,202.366 J2.4
NetJ2_2: J2.2 J3.4 | length 14.7
  Bottom Layer w0.508: J2.2 424.315,200.766 ccw(c424.315,201.616) 425.165,201.616 cw(c425.915,201.616) 425.915,202.366 J3.4
NetJ3_2: J3.2 J4.4 | length 14.7
  Bottom Layer w0.508: J3.2 443.365,200.766 ccw(c443.365,201.616) 444.215,201.616 cw(c444.965,201.616) 444.965,202.366 J4.4
NetJ4_2: J4.2 J5.4 | length 14.7
  Bottom Layer w0.508: J4.2 462.415,200.766 ccw(c462.415,201.616) 463.265,201.616 cw(c464.015,201.616) 464.015,202.366 J5.4
NetJ5_2: J5.2 J6.4 | length 34.3
  Bottom Layer w0.508: J6.4 454.211,181.823 ccw(c454.211,182.573) 454.961,182.573 454.961,182.583 cw(c455.794,182.583) 455.794,183.416 459.143,183.416 ccw(c459.143,184.49) 460.217,184.49 cw(c461.727,184.49) 461.727,186 466.75,186 ccw(c466.75,187) 467.75,187 467.75,188.25 cw(c469.75,188.25) 469.75,190.25 470.75,190.25 ccw(c470.75,191.765) 472.265,191.765 J5.2
NetJ6_2: J6.2 J7.4 | length 14.7
  Bottom Layer w0.508: J7.4 443.465,181.823 ccw(c443.465,182.573) 444.215,182.573 cw(c445.065,182.573) 445.065,183.423 J6.2
NetJ8_2: J8.2 J9.4 | length 14.7
  Bottom Layer w0.508: J9.4 405.365,181.823 ccw(c405.365,182.573) 406.115,182.573 cw(c406.965,182.573) 406.965,183.423 J8.2
NetJ9_2: J9.2 J10.4 | length 27.7
  Top Layer w0.508: v1(385.795,181.823) 385.795,166.79 ccw(c388.335,166.79) 388.335,164.25 v1(388.5,164.25) v1@388.354,164.104
  Bottom Layer w0.508: v1@385.7,181.8 cw(c385.723,181.8) 385.723,181.823 v1(385.795,181.823) cw(c386.972,181.823) 386.972,183 390.342,183 ccw(c390.342,183.423) J9.2 ; v1(388.5,164.25) 390.765,164.25 J10.4
NetJ10_2: J10.2 J11.4 | length 14.7
  Bottom Layer w0.508: J10.2 405.265,162.648 ccw(c405.265,163.498) 406.115,163.498 cw(c406.865,163.498) 406.865,164.248 J11.4
NetJ11_2: J11.2 J12.4 | length 14.7
  Bottom Layer w0.508: J11.2 424.315,162.648 ccw(c424.315,163.498) 425.165,163.498 cw(c425.915,163.498) 425.915,164.248 J12.4
NetJ12_2: J12.2 J13.4 | length 14.7
  Bottom Layer w0.508: J12.2 443.365,162.648 ccw(c443.365,163.498) 444.215,163.498 cw(c444.965,163.498) 444.965,164.248 J13.4
NetJ13_2: J13.2 J14.4 | length 27
  Top Layer w0.508: v1(455.794,162.57) 456.894,162.57 ccw(c456.894,163.498) 457.822,163.498 457.822,166.96 cw(c460.362,166.96) 460.362,169.5 471.569,169.5 ccw(c471.569,170.181) 472.25,170.181 v1(472.25,170.75)
  Bottom Layer w0.508: J13.2 ccw(c453.292,162.648) 453.292,162.57 v1(455.794,162.57) ; v1(472.25,170.75) 472.25,172.239 J14.4
NetJ15_2: J15.2 J16.4 | length 14.7
  Bottom Layer w0.508: J16.4 443.465,143.74 ccw(c443.465,144.49) 444.215,144.49 cw(c445.065,144.49) 445.065,145.34 J15.2
NetJ16_2: J16.2 J17.4 | length 14.7
  Bottom Layer w0.508: J17.4 424.415,143.74 ccw(c424.415,144.49) 425.165,144.49 cw(c426.015,144.49) 426.015,145.34 J16.2
NetJ17_2: J17.2 J18.4 | length 14.7
  Bottom Layer w0.508: J18.4 405.365,143.74 ccw(c405.365,144.49) 406.115,144.49 cw(c406.965,144.49) 406.965,145.34 J17.2
NetJ18_2: J18.2 J19.4 | length 28.4
  Top Layer w0.508: v1(385.7,143.8) 385.7,127.14 ccw(c386.694,127.14) 386.694,126.146 387.854,126.146 v1(388,126)
  Bottom Layer w0.508: v1@385.73,143.77 v1(385.7,143.8) 386.375,143.8 ccw(c386.375,144.49) 387.065,144.49 cw(c387.915,144.49) 387.915,145.34 J18.2 ; v1(388,126) 390.59,126 ccw(c390.59,126.175) J19.4
NetJ19_2: J19.2 J20.4 | length 14.7
  Bottom Layer w0.508: J19.2 405.265,124.575 ccw(c405.265,125.425) 406.115,125.425 cw(c406.865,125.425) 406.865,126.175 J20.4
NetJ20_2: J20.2 J21.4 | length 14.7
  Bottom Layer w0.508: J20.2 424.315,124.575 ccw(c424.315,125.425) 425.165,125.425 cw(c425.915,125.425) 425.915,126.175 J21.4
NetJ22_2: J22.2 J23.4 | length 22
  Bottom Layer w0.508: J22.2 455.645,124.575 ccw(c455.645,127.115) 458.185,127.115 458.185,129 cw(c459.435,129) 459.435,130.25 463.25,130.25 ccw(c463.25,131.5) 464.396,131 ccw(c463.25,131.5) 464.5,131.5 464.5,134.25 cw(c465.748,134.25) 465.748,135.498 J23.4
NetR1_1: R1.1 U1.20 | length 5.4
  Bottom Layer w0.508: R1.1 494.2,205.14 ccw(c496.74,205.14) 496.74,202.6 U1.20
Row0: D1.2 D2.2 D3.2 D4.2 D5.2 U1.8 | length 103
  Top Layer w0.508: v1(462.5,196.4) ccw(c463.92,196.4) 463.92,194.98 U1.8
  Bottom Layer w0.508: D1.2 D2.2 D3.2 D4.2 442.78,198.94 445.32,196.4 v1(462.5,196.4) cw(c462.5,197.07) 461.83,197.07 D5.2 ; U1.8 U1.8@482.67,194.81
Row1: D6.2 D7.2 D8.2 D9.2 D10.2 U1.9 | length 118.2
  Top Layer w0.508: v1(445.104,180.45) 461.166,180.45 ; v1(460.425,170.9) 460.425,179.375 cw(c461.5,179.375) 461.181,180.401 cw(c461.5,179.375) 461.5,180.45 ; 461.551,180.45 462.46,180.45 ccw(c462.46,181.39) 463.4,181.39 463.4,186.15 cw(c464.75,186.15) 464.75,187.5 ccw(c464.75,188.5) 465.75,188.5 465.75,191.39 cw(c466.8,191.39) 466.8,192.44 U1.9
  Bottom Layer w0.508: D6.2 D7.2 D8.2 D9.2 445.079,180.475 cw(c445.079,180.45) v1(445.104,180.45) ; v1(460.425,170.9) cw(c460.55,170.9) 460.55,171.025 D10.2
Row2: D11.2 D12.2 D13.2 D14.2 D15.2 U1.10 | length 144.2
  Top Layer w0.508: v1(469.25,185.25) 476.96,185.25 ccw(c476.96,187.79) 479.5,187.79 479.5,188 cw(c481.4,188) 481.4,189.9 U1.10
  Bottom Layer w0.508: D11.2 D12.2 D13.2 D14.2 455.724,161.4 ccw(c455.724,162.57) 456.894,162.57 456.894,166.763 cw(c457.983,166.763) 457.983,167.852 ccw(c457.983,169.069) 459.2,169.069 459.2,180.2 cw(c461.5,180.2) 461.5,182.5 466.71,182.5 ccw(c466.71,185.04) 469.25,185.04 v1(469.25,185.25) ; D15.2 481.3,175.25 cw(c483.3,175.25) 481.3,175.287 cw(c483.263,175.287) 483.263,177.25 483.3,177.25 ccw(c483.3,179.7) 485.75,179.7 485.75,187.36 ccw(c483.21,187.36) 483.21,189.9 U1.10
Row3: D16.2 D17.2 D18.2 D19.2 D20.2 U1.11 | length 158.4
  Top Layer w0.508: v1(457.1,137.4) 457.1,134.64 ccw(c459.64,134.64) 459.64,132.1 v1(461.8,132.1) ; v1@467.544,144 v1(467.75,144) 467.75,146.75 cw(c468.75,146.75) 468.75,147.75 470.75,147.75 ccw(c470.75,150.5) 473.5,150.5 473.5,166.71 cw(c474.54,166.71) 474.54,167.75 477.46,167.75 ccw(c477.46,170.29) 480,170.29 480,176.25 cw(c482,176.25) 482,178.25 482.75,178.25 ccw(c482.75,179.75) 484.25,179.75 484.25,185.61 ccw(c482.5,185.61) U1.11
  Bottom Layer w0.508: D16.2 D17.2 D18.2 D19.2 442.78,139.94 ccw(c445.32,139.94) 445.32,137.4 v1(457.1,137.4) 457.1,141.46 cw(c459.64,141.46) 459.64,144 v1(467.75,144) ; v1(461.8,132.1) D20.2
Row4: D21.2 D22.2 D23.2 D24.2 U1.12 | length 154.9
  Top Layer w0.508: v1(478.75,170.5) 478.75,183.704 cw(c479.866,183.704) 479.866,184.82 U1.12
  Bottom Layer w0.508: D21.2 D22.2 D23.2 442.6,123.425 ccw(c442.6,123.525) D24.2 448.877,123.525 cw(c448.875,123.017) 448.919,123.523 ccw(c448.965,124.025) 448.965,123.521 452.165,123.521 ccw(c452.165,124.025) 452.211,123.523 cw(c452.255,123.017) 452.253,123.525 465.627,123.525 ccw(c465.627,125.648) 467.75,125.648 467.75,127.25 cw(c470,127.25) 470,129.5 476.381,129.5 ccw(c476.381,131.887) 478.768,131.887 478.768,154.387 478.75,154.387 v1(478.75,170.5)
VCC: C1.2 C2.2 C3.2 C4.2 C5.2 C6.2 C7.2 C8.2 C9.2 C10.2 C11.2 C12.2 C13.2 C14.2 C15.2 C16.2 C17.2 C18.2 C19.2 C20.2 C21.2 C22.2 C23.2 U1.21 | length 4.4
  Bottom Layer w1.27: v1(468.6,130.9) C23.2 ; C14.2 470.365,165.635 ccw(c470.5,165.635) v1(470.5,165.5)
pads on no net: J1.Un1 J2.Un1 J3.Un1 J4.Un1 J5.Un1 J6.Un1 J7.Un1 J8.Un1 J9.Un1 J10.Un1 J11.Un1 J12.Un1 J13.Un1 J14.Un1 J15.Un1 J16.Un1 J17.Un1 J18.Un1 J19.Un1 J20.Un1 J21.Un1 J22.Un1 J23.2 J23.Un1 S1.Un1 S1.Un2 S1.Un3 S1.Un4 S1.Un5 S2.Un1 S2.Un2 S2.Un3 S2.Un4 S2.Un5 S3.Un1 S3.Un2 S3.Un3 S3.Un4 S3.Un5 S4.Un1 S4.Un2 S4.Un3 S4.Un4 S4.Un5 S5.Un1 S5.Un2 S5.Un3 S5.Un4 S5.Un5 S6.Un1 S6.Un2 S6.Un3 S6.Un4 S6.Un5 S7.Un1 S7.Un2 S7.Un3 S7.Un4 S7.Un5 S8.Un1 S8.Un2 S8.Un3 S8.Un4 S8.Un5 S9.Un1 S9.Un2 S9.Un3 S9.Un4 S9.Un5 S10.Un1 S10.Un2 S10.Un3 S10.Un4 S10.Un5 S11.Un1 S11.Un2 S11.Un3 S11.Un4 S11.Un5 S12.Un1 S12.Un2 S12.Un3 S12.Un4 S12.Un5 S13.Un1 S13.Un2 S13.Un3 S13.Un4 S13.Un5 S14.Un1 S14.Un2 S14.Un3 S14.Un4 S14.Un5 S15.Un1 S15.Un2 S15.Un3 S15.Un4 S15.Un5 S16.Un1 S16.Un2 S16.Un3 S16.Un4 S16.Un5 S17.Un1 S17.Un2 S17.Un3 S17.Un4 S17.Un5 S18.Un1 S18.Un2 S18.Un3 S18.Un4 S18.Un5 S19.Un1 S19.Un2 S19.Un3 S19.Un4 S19.Un5 S20.Un1 S20.Un2 S20.Un3 S20.Un4 S20.Un5 S21.Un1 S21.Un2 S21.Un3 S21.Un4 S21.Un5 S22.Un1 S22.Un2 S22.Un3 S22.Un4 S22.Un5 S23.Un1 S23.Un2 S23.Un3 S23.Un4 S23.Un5 U1.1 U1.2 U1.5 U1.6 U1.7 U1.22 U1.24

## Polygon pours and split planes (outlines as drawn)
VCC on Top Layer "VCC" (solid, remove dead copper, pour order 0): 479,120.25 384.25,120.25 384.25,211.5 499,211.5 499,182.75 479,182.75
GND on Bottom Layer "GND" (solid, remove dead copper, pour order 1): 479,169 499,169 499,211.5 384.25,211.5 384.25,120.261 479,120.261

## Silkscreen, mask and mechanical layers (free items; w line width, h text height)
Top Overlay:
  drawing of 6 lines, arcs and shapes, not listed
Bottom Overlay:
  text "StrmPad v2 / Howin Tam 0422" at 477.5,154.75 h1.52
Mechanical 1:
  lines w0.254: 480,119.25 383.25,119.25 383.25,218.3 384.9,218.3 386.1,218.3 499.575,218.3 500,218.3 500,217.3 500,163.2 480,163.2 480,119.25 ; 480,119.25 480,119.25